# Altium PCB User Interface.PcbDoc
Units mm, origin at the board's own origin, x right, y up, seen from the top; angles counter-clockwise.
Board outline 130 x 100 mm, 2 copper layers (Top Layer, Bottom Layer); 14 components, 15 nets, 96 pads, 2 vias.
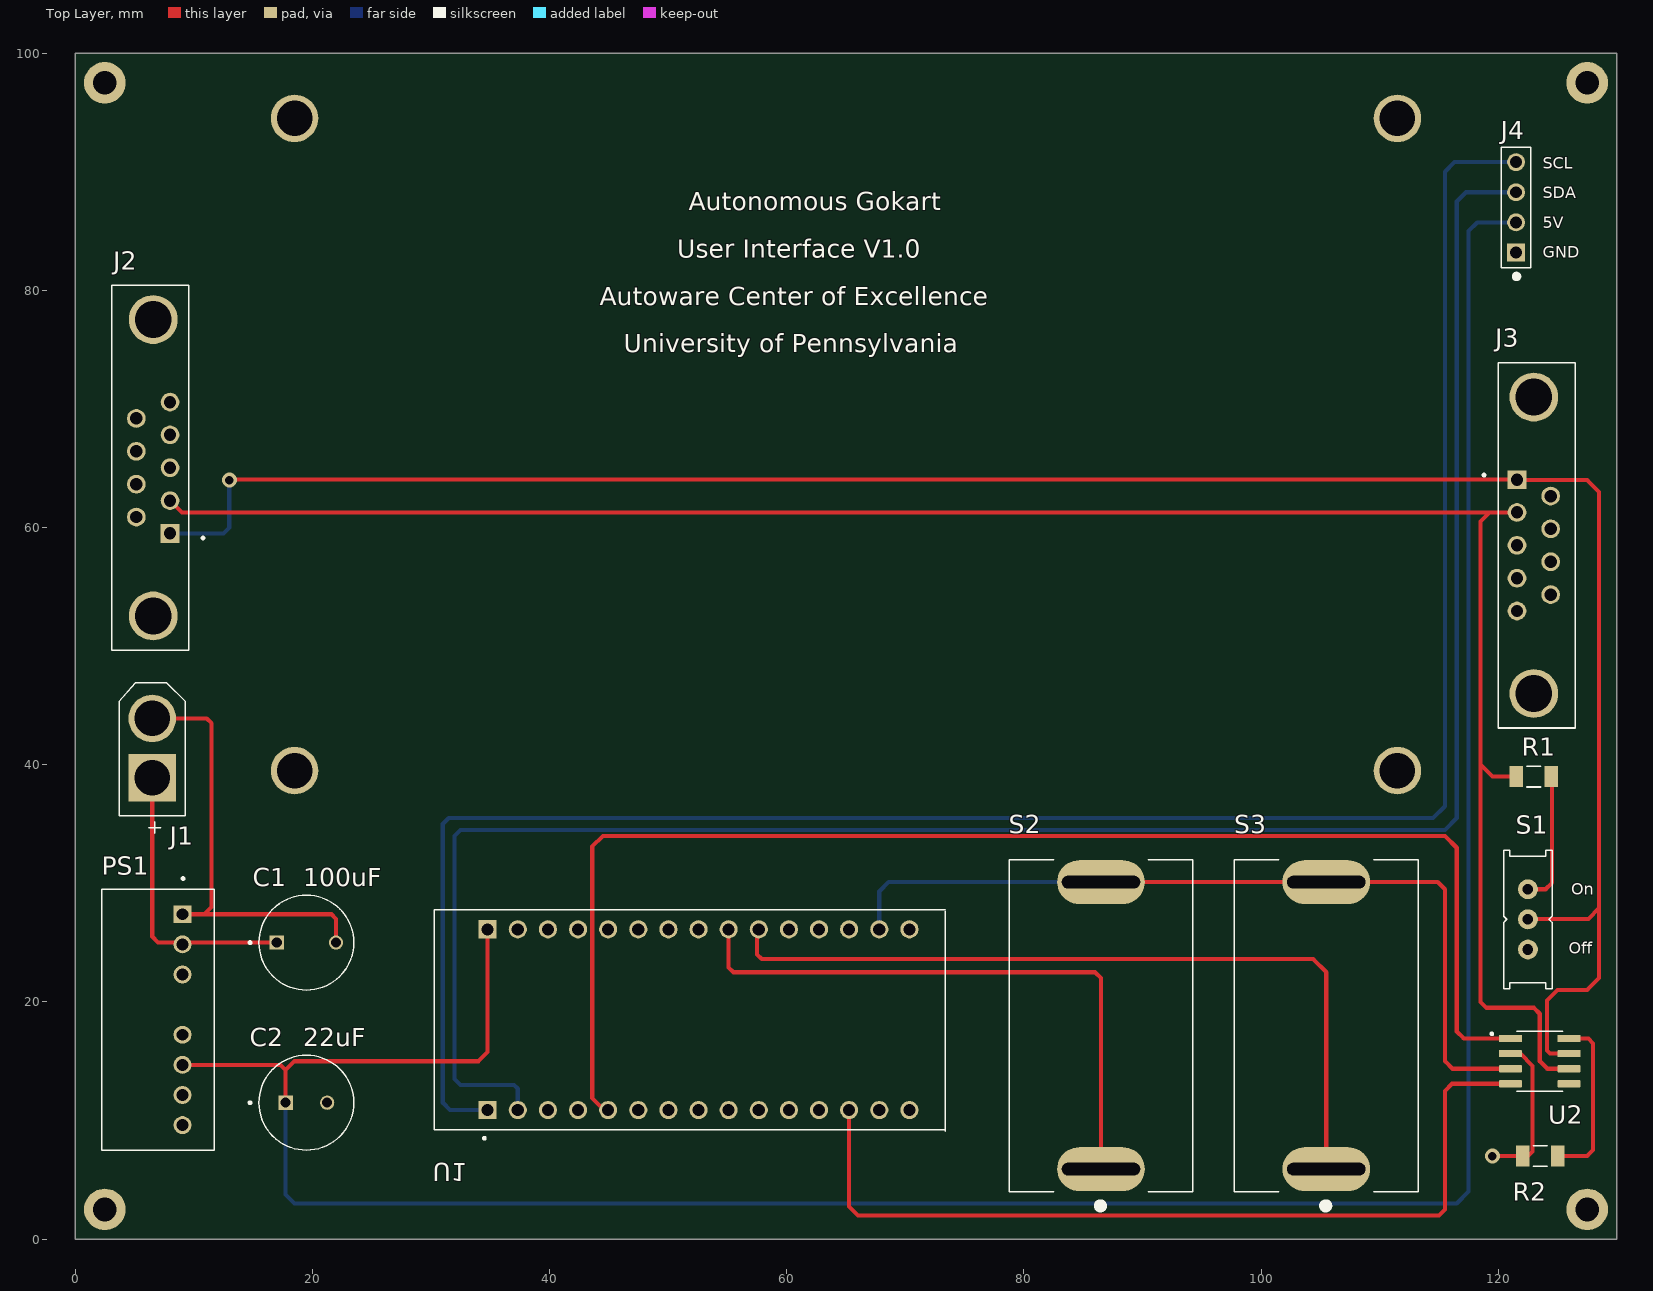
[diagram p0: Top Layer view]
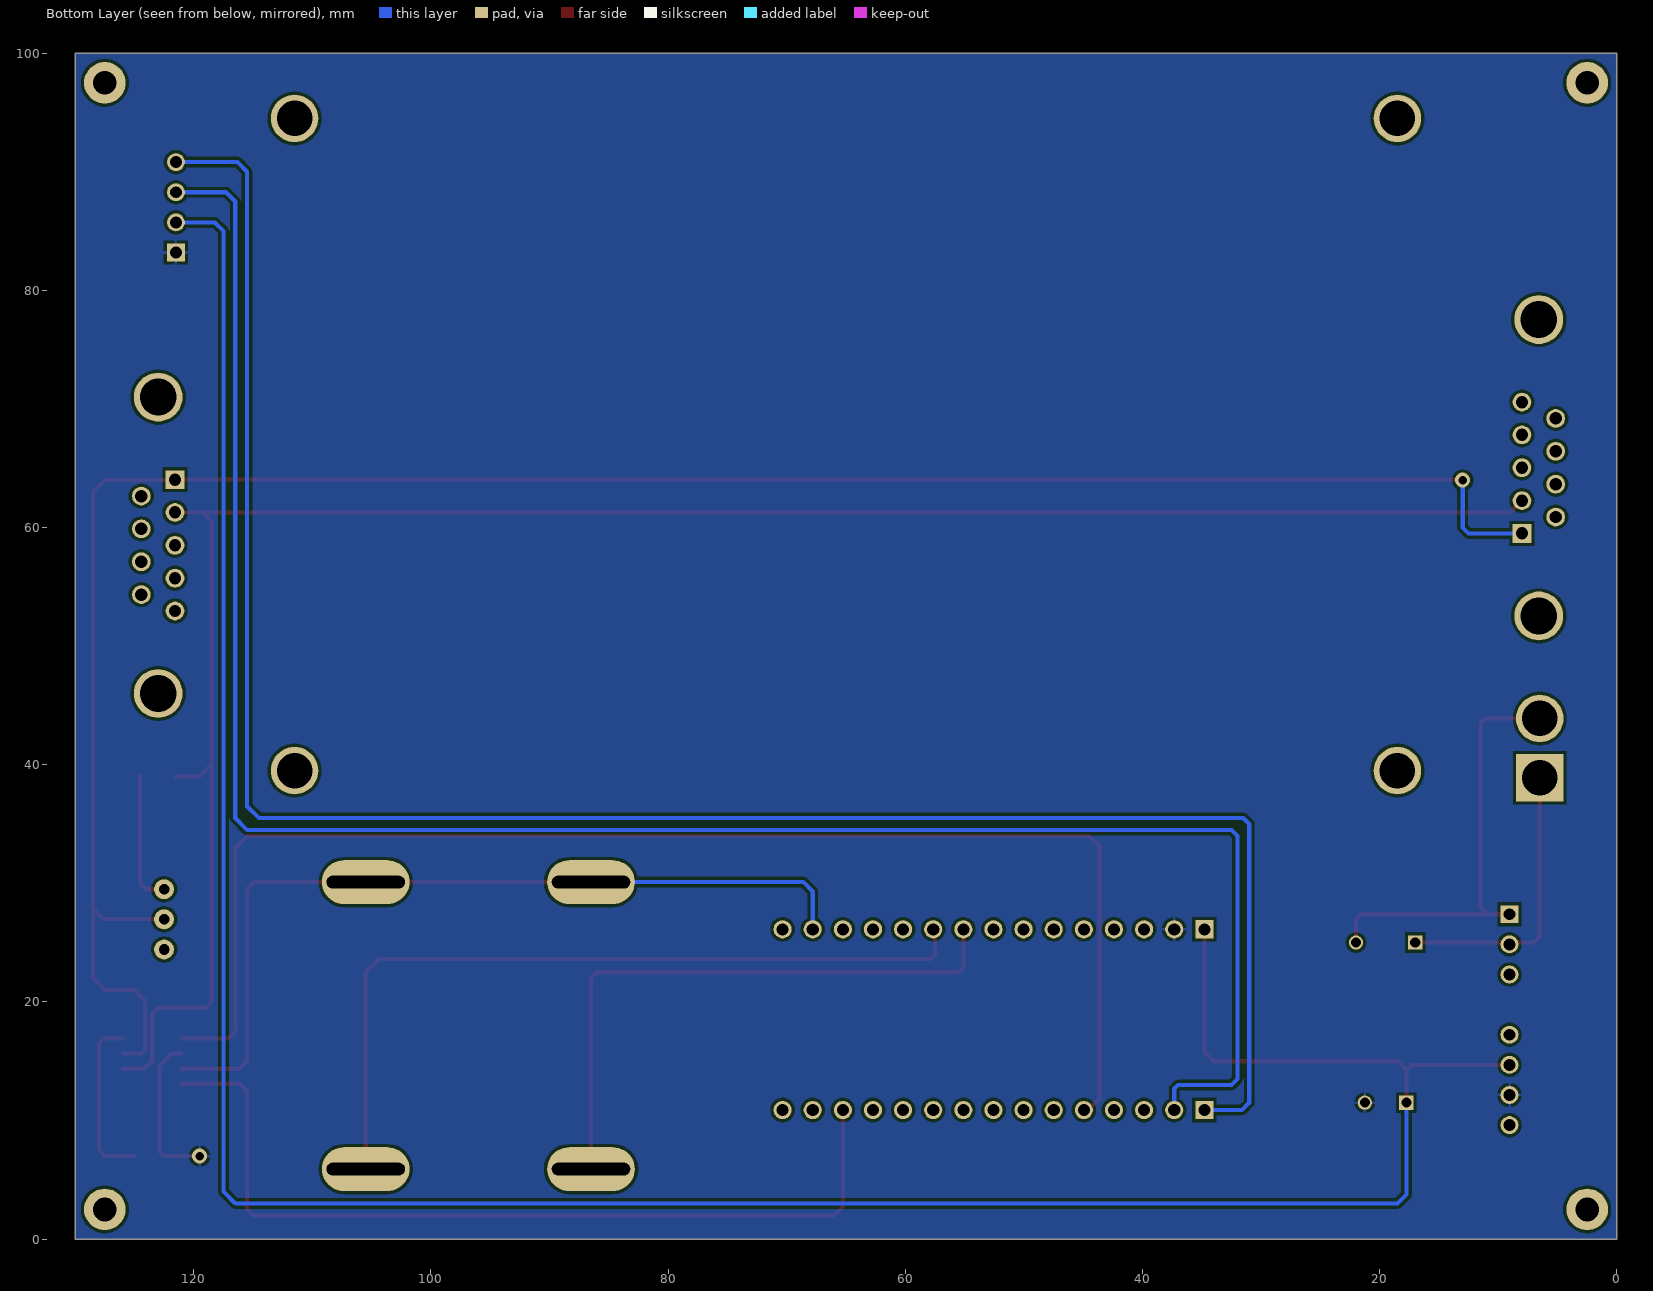
[diagram p1: Bottom Layer view, seen from below]

## Layer stack, top to bottom
Top Solder: solder mask 0.0102, Solder Resist, Dk 3.5
Top Layer: signal copper 0.0356
Dielectric 1: dielectric 0.32, FR-4, Dk 4.8
Bottom Layer: signal copper 0.0356
Bottom Solder: solder mask 0.0102, Solder Resist, Dk 3.5

## Board outline
0,0 0,100 130,100 130,0

## Design rules (kind name [scope] priority, off if disabled: settings)
Clearance [All] p1: gap=0.254 ignorepadtopadclearanceinfootprint=FALSE except(0: Arc-Hole Track-Hole SMDPad-Hole THPad-Hole Via-Hole Fill-Hole Poly-Hole Region-Hole Text-Hole)
HoleSize [All] p1: absolutevalues=TRUE maxlimit=7 minlimit=0.025 maxpercent=80.000 minpercent=20.000
PolygonConnect [All] p1: connectstyle=Relief reliefconductorwidth=0.254 reliefentries=4 polygonreliefangle="90 Angle" airgapwidth=0.254
RoutingVias [All] p1: holewidth=0.711 width=1.27 viastyle="Through Hole" minholewidth=0.711 minwidth=1.27 maxholewidth=0.711 maxwidth=1.27
SolderMaskExpansion [All] p1: expansion=0.102 istentingtop=FALSE
Width [All] p1: maxlimit=0.35 minlimit=0.254 preferedwidth=0.35 minimp=50.000000 maximp=50.000000 favimp=50.000000
29 further rules are at their usual default settings.

## Components (designator, comment, footprint, x,y, rotation, side; value= is the part's Value field where it differs from the comment)
C1 "EEUFM1H101B" CAPPRD500W60D800H1150 19.5,25 r0 top
C2 "EEUTA1H220" CAPPRD350W60D800H1150 19.5,11.5 r0 top
J1 "XT30-M" AMASS_XT60-M 6.5,42.5 r90 top
J2 "A-DF_09_A_KG-T2S" ASSMANN_A-DF_09_A_KG-T2S 6.58,65.04 r270 top
J3 "A-DF_09_A_KG-T2S" ASSMANN_A-DF_09_A_KG-T2S 123,58.5 r90 top
J4 "826629-4" TE_826629-4 121.5,87 r90 top
PS1 "PRM3W-E12-S5-S" CONV_PRM3W-E12-S5-S 7,18.5 r270 top
R1 "120" RESC3216X65N 123,39 r180 top
R2 "10K" RESC3216X65N 123.53,7 r180 top
S1 "EG1218" EG1218 122.5,26.96 r90 top
S2 "ST141D00" SW_ST141D00 86.5,18 r90 top
S3 "ST141D00" SW_ST141D00 105.5,18 r90 top
U1 "NUCLEO-L432KC" MODULE_NUCLEO-L432KC 51,18.5 r90 top
U2 "SN65HVD230QDR" SOIC127P599X175-8N 123.5,15 r0 top

## Footprints (in the part's own frame and the unit in brackets; to place one, negate y for a bottom-side part, rotate by r counter-clockwise, add the part's x,y. Pads: shape width x height; smd on the part's side, far side on the other; paste and mask are expansions set on the pad)
AMASS_XT60-M [mm]
  round 4 hole 3: N(1.4,0)
  rect 4x4 hole 3: P(-3.6,0)
  silkscreen extent -8.3,-2.8 4.4,2.8
ASSMANN_A-DF_09_A_KG-T2S [mm]
  rect 1.575x1.575 / inner round 1.575 / far side rect 1.575x1.575 hole 1.05: 1(5.54,1.42)
  round 1.575 hole 1.05: 2(2.77,1.42) 3(0,1.42) 4(-2.77,1.42) 5(-5.54,1.42) 6(4.155,-1.42) 7(1.385,-1.42) 8(-1.385,-1.42) 9(-4.155,-1.42)
  round 4.116 hole 3.1: S1(-12.495,0) S2(12.495,0)
  silkscreen extent -15.41,-3.5 15.41,4.3
CAPPRD350W60D800H1150 [mm]
  round 1.2 hole 0.85: N(1.75,0)
  rect 1.2x1.2 / inner round 1.2 / far side rect 1.2x1.2 hole 0.85: P(-1.75,0)
  silkscreen extent -4.85,-4 4,4, body extent -4,-4 4,4, height 11.5
CAPPRD500W60D800H1150 [mm]
  round 1.2 hole 0.85: N(2.5,0)
  rect 1.2x1.2 hole 0.85: P(-2.5,0)
  silkscreen extent -4.85,-4 4,4, body extent -4,-4 4,4, height 11.5
CONV_PRM3W-E12-S5-S [mm]
  rect 1.508x1.508 hole 1: 1(-8.89,2.05)
  round 1.508 hole 1: 2(-6.35,2.05) 3(-3.81,2.05) 5(1.27,2.05) 6(3.81,2.05) 7(6.35,2.05) 8(8.89,2.05)
  silkscreen extent -12,-4.75 11,4.75
EG1218 [mil]
  round 66 hole 35.43: O(-100,0) P(0,0) S(100,0)
  silkscreen extent -230,-80 230,80
MODULE_NUCLEO-L432KC [mm]
  rect 1.53x1.53 hole 1.02: CN3_1(-7.62,16.215) CN4_1(7.62,16.215)
  round 1.53 hole 1.02: CN3_2(-7.62,13.675) CN3_3(-7.62,11.135) CN3_4(-7.62,8.595) CN3_5(-7.62,6.055) CN3_6(-7.62,3.515) CN3_7(-7.62,0.975) CN3_8(-7.62,-1.565) CN3_9(-7.62,-4.105) CN3_10(-7.62,-6.645) CN3_11(-7.62,-9.185) CN3_12(-7.62,-11.725) CN3_13(-7.62,-14.265) CN3_14(-7.62,-16.805) CN3_15(-7.62,-19.345) CN4_2(7.62,13.675) CN4_3(7.62,11.135) CN4_4(7.62,8.595) CN4_5(7.62,6.055) CN4_6(7.62,3.515) CN4_7(7.62,0.975) CN4_8(7.62,-1.565) CN4_9(7.62,-4.105) CN4_10(7.62,-6.645) CN4_11(7.62,-9.185) CN4_12(7.62,-11.725) CN4_13(7.62,-14.265) CN4_14(7.62,-16.805) CN4_15(7.62,-19.345)
  silkscreen extent -10.1,-22.35 9.27,20.7
RESC3216X65N [mm]
  rect 1.13x1.77 smd: 1(-1.47,0) 2(1.47,0)
  silkscreen extent -0.58,-0.88 0.58,0.88
SOIC127P599X175-8N [mm]
  rrect25% 1.97x0.6 smd: 1(-2.47,1.905) 2(-2.47,0.635) 3(-2.47,-0.635) 4(-2.47,-1.905) 5(2.47,-1.905) 6(2.47,-0.635) 7(2.47,0.635) 8(2.47,1.905)
  silkscreen extent -4.14,-2.52 1.95,2.52, body extent -3,-2.45 3,2.45, height 1.75
SW_ST141D00 [mm]
  oval 3.7x7.4 hole 1.05 slot 6.6 at 90 deg: 1(-12.1,0) 3(12.1,0)
  silkscreen extent -15.45,-7.75 14,7.75
TE_826629-4 [mm]
  rect 1.508x1.508 hole 1: 1(-3.81,0)
  round 1.508 hole 1: 2(-1.27,0) 3(1.27,0) 4(3.81,0)
  silkscreen extent -6.03,-1.25 5.08,1.25

## Part data
C1: "Cap Aluminum Lytic 100uF 50V 20% (8 X 11.5mm) Radial 5mm 870mA 3000h 105C Ammo Pack", Package="RADIAL-2 Panasonic", Availability="In Stock", Check_prices=https://www.snapeda.com/parts/EEUFM1H101B/Panasonic/view-part/5783638/?ref=eda, MF=Panasonic, MP=EEUFM1H101B, Price=None, SnapEDA_Link=https://www.snapeda.com/parts/EEUFM1H101B/Panasonic/view-part/5783638/?ref=snap
C2: "22F 50V Aluminum Electrolytic Capacitors Radial, Can 2000 Hrs @ 125C", Package="RADIAL-2 Panasonic", Availability="In Stock", Check_prices=https://www.snapeda.com/parts/EEU-TA1H220/Panasonic/view-part/?ref=eda, MF=Panasonic, MP=EEU-TA1H220, Price=None, Purchase-URL=https://pricing.snapeda.com/search/part/EEU-TA1H220/?ref=eda, SnapEDA_Link=https://www.snapeda.com/parts/EEU-TA1H220/Panasonic/view-part/?ref=snap
J1: "Plug; DC supply; XT60; male; PIN: 2; for cable; soldered; 30A; 500V", Package=Package, Availability="Not in stock", Check_prices=https://www.snapeda.com/parts/XT60-M/AMASS/view-part/?ref=eda, MF=AMASS, MP=XT60-M, Price=None, SnapEDA_Link=https://www.snapeda.com/parts/XT60-M/AMASS/view-part/?ref=snap
J2 J3: "9 Position D-Sub Receptacle, Female Sockets Connector", Package=None, Availability="In Stock", Check_prices=https://www.snapeda.com/parts/A-DF%2009%20A/KG-T2S/Assmann+WSW+Components/view-part/?ref=eda, MF="Assmann WSW", MP="A-DF 09 A/KG-T2S", Price=None, Purchase-URL="https://pricing.snapeda.com/search/part/A-DF 09 A/KG-T2S/?ref=eda", SnapEDA_Link=https://www.snapeda.com/parts/A-DF%2009%20A/KG-T2S/Assmann+WSW+Components/view-part/?ref=snap
J4: "Conn Unshrouded Header HDR 4 POS 2.54mm Solder ST Thru-Hole Automotive Carton", Package=None, Availability=Unavailable, EU_RoHS_Compliance=Compliant, MF="TE Connectivity", MP=826629-4, Price=None, SnapEDA_Link=https://www.snapeda.com/parts/826629-4/TE%20Connectivity%20AMP%20Connectors/view-part/891255/?ref=snap, TE_purchase_URL=https://www.te.com/usa-en/product-826629-4.html?te_bu=Cor&te_type=disp&te_campaign=seda_glo_cor-seda-global-disp-prtnr-fy19-seda-model-bom-cta_sma-317_1&elqCampaignId=32493
PS1: Package=None, Availability=Unavailable, MF="{'manufacturer': u'CUI'}", MP=PRM3W-E12-S5-S, Price=None
R1 R2: library part KTR18EZPF9530, Package=None, Availability=Unavailable, MP=KTR18EZPF9530, Price=None
S1: "<b>SLIDING SWITCH</b><p> 0.1\" spacing through hole, vertical SPDT slide switch <p>http://www.ladyada.net/library/pcb/eaglelibrary.html</p>", Package=None, Availability=Unavailable, MP=EG1218, Price=None
S2 S3: "Toggle Switch SPST Panel Mount", Package=None, Availability=Unavailable, MF=E-Switch, MP=ST141D00, Price=None, SnapEDA_Link=https://www.snapeda.com/parts/ST141D00/E-Switch/view-part/378912/?ref=snap
U1: "STM32 Nucleo-32 development board with STM32L432KC MCU, supports Arduino connectivity", Package=None, Availability=Unavailable, MP=NUCLEO-L432KC, Price=None
U2: "3.3-V CAN Transceiver with Standby Mode 8-SOIC -40 to 125", Package="SOIC-8 Texas Instruments", Availability=Good, Check_prices=https://www.snapeda.com/parts/SN65HVD230QDR/Texas%20Instruments/view-part/1178075/?ref=eda, MF="Texas Instruments", MP=SN65HVD230QDR, Price=None, Purchase-URL=https://pricing.snapeda.com/search/part/SN65HVD230QDR/?ref=eda, SnapEDA_Link=https://www.snapeda.com/parts/SN65HVD230QDR/Texas%20Instruments/view-part/1178075/?ref=snap

## Free pads (board coordinates)
  round 3.5 hole 2: 1(2.5,2.5) 2(127.5,2.5) 3(127.5,97.5) 4(2.5,97.5)
  round 4 hole 3: ""(18.5,39.5) ""(18.5,94.5) ""(111.5,39.5) ""(111.5,94.5)

## Via types
v1: diameter 1.27, hole 0.711, Top Layer to Bottom Layer, 2 vias

## Nets (pads, with @x,y where several pads share a name; then routed paths per layer and width w, separated by ;. In a path a pad name is that pad's centre, name@x,y a point inside that pad or via, vN(x,y) a via of type N, cw(c..) or ccw(c..) an arc to the next point about the centre after c; other vN are vias at no path point)
3.3V: S2.3 S3.3 U1.CN4_14 U2.3 | length 71.8
  Top Layer w0.35: S2.3 S3.3 114.9,30.1 115.5,29.5 115.5,15 116.135,14.365 U2.3
  Bottom Layer w0.35: U1.CN4_14 67.805,29.305 68.6,30.1 S2.3
5V: C2.P J4.2 PS1.6 U1.CN4_1 | length 233.2
  Top Layer w0.35: PS1.6 17.31,14.69 17.75,14.25 ; C2.P 17.75,14.25 ; U1.CN4_1 34.785,15.785 34,15 18.5,15 17.75,14.25
  Bottom Layer w0.35: C2.P 17.75,3.75 18.5,3 116.5,3 117.5,4 117.5,85 118.23,85.73 J4.2
+VIN: C1.P J1.P PS1.2 | length 24.2
  Top Layer w0.35: J1.P 6.5,25.5 7,25 8.9,25 PS1.2 9.2,25 C1.P
-VIN: C1.N J1.N PS1.1 | length 36.6
  Top Layer w0.35: J1.N 11.1,43.9 11.5,43.5 11.5,28 10.89,27.39 ; PS1.1 10.89,27.39 ; C1.N 22,27 21.61,27.39 10.89,27.39
A2: S3.1 U1.CN4_10 | length 67.4
  Top Layer w0.35: U1.CN4_10 57.5,25.975 57.5,24 57.896,23.604 85.75,23.604 104.396,23.604 105.5,22.5 S3.1
A3: S2.1 U1.CN4_9 | length 51.1
  Top Layer w0.35: U1.CN4_9 55.105,22.895 55.5,22.5 86,22.5 86.5,22 S2.1
CAN_HIGH: J2.1 J3.1 S1.P U2.7 | length 183.9
  Top Layer w0.35: v1@13.04,64.04 J3.1 121.58,64 127.5,64 128.5,63 128.5,27.9 ; S1.P@122.5,27 127.6,27 128.5,27.9 ; U2.7 124.365,15.635 124.104,15.896 124.104,20.104 125,21 127.5,21 128.5,22 128.5,27.9
  Bottom Layer w0.35: J2.1 12.5,59.5 13,60 v1(13,64)
CAN_LOW: J2.2 J3.2 R1.2 U2.6 | length 171.1
  Top Layer w0.35: J2.2 9,61.27 119.27,61.27 ; R1.2@121.5,39 119.5,39 118.5,40 ; J3.2 119.27,61.27 ; U2.6 124.135,14.365 123.5,15 123.5,19 123,19.5 119,19.5 118.5,20 118.5,40 ; 118.5,40 118.5,60.5 119.27,61.27
CAN_RX: U1.CN3_13 U2.4 | length 74.7
  Top Layer w0.35: U1.CN3_13 65.265,2.735 66,2 115,2 115.5,2.5 115.5,12.5 116.095,13.095 U2.4
CAN_TX: U1.CN3_5 U2.1 | length 117.1
  Top Layer w0.35: U1.CN3_5@45,10.5 43.599,11.901 43.599,25.625 43.599,26.615 43.599,33.099 44.5,34 115.5,34 116.5,33 116.5,17.5 117.095,16.905 U2.1
GND: C2.N J4.1 PS1.7 R2.2 U1.CN4_2 U2.2 | length 13.1
  Top Layer w0.35: v1(119.5,7) 122.5,7 122.896,7.396 122.896,14.604 121.865,15.635 U2.2
I2C1_SCL: J4.4 U1.CN3_1 | length 172.5
  Bottom Layer w0.35: U1.CN3_1 31.62,10.88 31,11.5 31,35 31.5,35.5 114.5,35.5 115.5,36.5 115.5,90 116.31,90.81 J4.4
I2C1_SDA: J4.3 U1.CN3_2 | length 170.4
  Bottom Layer w0.35: U1.CN3_2 37.325,12.675 37,13 32.5,13 32,13.5 32,34 32.5,34.5 115.5,34.5 116.5,35.5 116.5,87.5 117.27,88.27 J4.3
NetR1_1: R1.1 S1.S | length 11.3
  Top Layer w0.35: S1.S 124,29.5 124.54,30.04 R1.1@124.54,39.063
NetR2_1: R2.1 U2.8 | length 14.4
  Top Layer w0.35: R2.1 127.5,7 128,7.5 128,16.5 127.595,16.905 U2.8
pads on no net: J2.3 J2.4 J2.5 J2.6 J2.7 J2.8 J2.9 J2.S1 J2.S2 J3.3 J3.4 J3.5 J3.6 J3.7 J3.8 J3.9 J3.S1 J3.S2 PS1.3 PS1.5 PS1.8 S1.O U1.CN3_3 U1.CN3_4 U1.CN3_6 U1.CN3_7 U1.CN3_8 U1.CN3_9 U1.CN3_10 U1.CN3_11 U1.CN3_12 U1.CN3_14 U1.CN3_15 U1.CN4_3 U1.CN4_4 U1.CN4_5 U1.CN4_6 U1.CN4_7 U1.CN4_8 U1.CN4_11 U1.CN4_12 U1.CN4_13 U1.CN4_15 U2.5

## Polygon pours and split planes (outlines as drawn)
GND on Bottom Layer "NONET_L02_P-001" (solid, pour order 0): 0,100 130,100 130,0 0,0

## Silkscreen, mask and mechanical layers (free items; w line width, h text height)
Top Overlay:
  text "SCL" at 123.754,90.254 h1
  text "SDA" at 123.754,87.754 h1
  text "Autonomous Gokart" at 51.754,86.754 h1.52
  text "5V" at 123.754,85.254 h1
  text "User Interface V1.0" at 50.754,82.754 h1.52
  text "GND" at 123.754,82.754 h1
  text "Autoware Center of Excellence" at 44.254,78.754 h1.52
  text "University of Pennsylvania" at 46.254,74.762 h1.52
  text "100uF" at 19.254,29.754 h1.52
  text "On" at 126.154,29.054 h1
  text "Off" at 125.954,24.054 h1
  text "22uF" at 19.254,16.254 h1.52
Mechanical 1:
  the board outline again, w0.254